# EAGLE board SO16 (EAGLE 6.4)
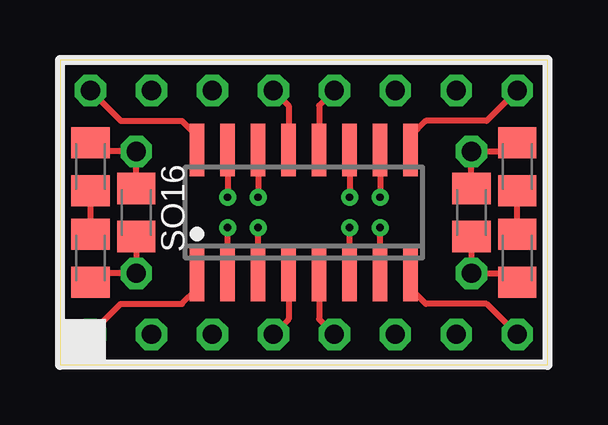
[diagram p0: board, top side]
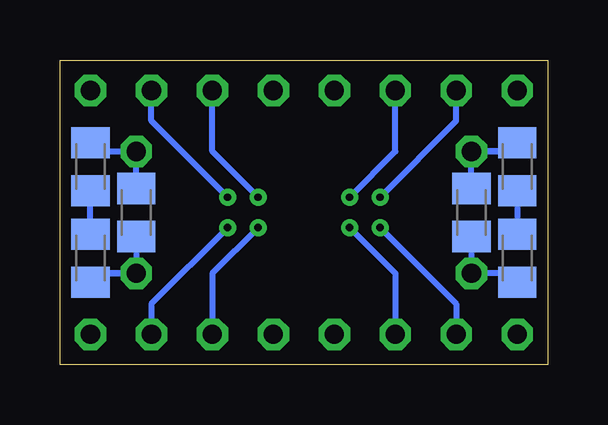
[diagram p1: board, bottom side, seen from below]

Size 20.32 x 12.7 mm. Coordinates in mm from the lower left corner, seen from the top.
Outline: 0,0 20.32,0 20.32,12.7 0,12.7 0,0
Copper layers (1*16): Top 0.035mm / dielectric 1.5mm / Bottom 0.035mm
Design rules "default": minimum track width 10mil, minimum drill 0.6mm, track to track 8mil, track to pad 8mil, pad to pad 8mil, via to via 8mil, smd to smd 8mil, copper to edge 40mil, drill to drill 8mil, minimum pad ring 10mil, minimum via ring 8mil, stop-mask expansion 4mil, vias tented up to drill 0mil, thermal gap 10mil

## Footprints (pad centres in the part's own frame; a part is rotated, then mirrored left to right if it is on the bottom)
SO16 = smd 0.6 x 2.2: 1 -4.445,-2.6; 2 -3.175,-2.6; 3 -1.905,-2.6; 4 -0.635,-2.6; 5 0.635,-2.6; 6 1.905,-2.6; 7 3.175,-2.6; 8 4.445,-2.6; 9 4.445,2.6; 10 3.175,2.6; 11 1.905,2.6; 12 0.635,2.6; 13 -0.635,2.6; 14 -1.905,2.6; 15 -3.175,2.6; 16 -4.445,2.6
1 = drill 0.8 octagon: P$1 0,0
C0805K = smd 1.3 x 1.6: 1 -1,0; 2 1,0

## Placement (x,y rotation side)
E$71  [SO16]  10.16,6.35 0 top
E$280  [1]  1.27,1.27 0 top
E$292  [1]  3.81,1.27 0 top
E$293  [1]  6.35,1.27 0 top
E$294  [1]  8.89,1.27 0 top
E$295  [1]  11.43,1.27 0 top
E$296  [1]  13.97,1.27 0 top
E$297  [1]  16.51,1.27 0 top
E$298  [1]  1.27,11.43 0 top
E$299  [1]  3.81,11.43 0 top
E$300  [1]  6.35,11.43 0 top
E$301  [1]  8.89,11.43 0 top
E$302  [1]  11.43,11.43 0 top
E$303  [1]  13.97,11.43 0 top
E$304  [1]  16.51,11.43 0 top
E$305  [C0805K]  3.17,6.35 270 top
E$306  [1]  3.17,3.81 180 top
E$307  [1]  3.17,8.89 180 top
E$308  [C0805K]  1.27,4.45 270 top
E$309  [C0805K]  1.27,8.26 270 top
E$310  [C0805K]  1.27,4.45 270 bottom
E$311  [C0805K]  1.27,8.26 270 bottom
E$312  [C0805K]  3.17,6.35 270 bottom
E$313  [1]  19.05,11.43 0 top
E$314  [1]  19.05,1.27 0 top
E$649  [C0805K]  17.14,6.35 90 top
E$650  [1]  17.14,8.89 0 top
E$651  [1]  17.14,3.81 0 top
E$652  [C0805K]  19.05,8.26 90 top
E$653  [C0805K]  19.05,4.45 90 top
E$654  [C0805K]  19.05,8.26 90 bottom
E$655  [C0805K]  19.05,4.45 90 bottom
E$656  [C0805K]  17.14,6.35 90 bottom

## Library data of the parts
E$71 E$305 E$308-E$312 E$649 E$652-E$656 = ref-packages
E$280 E$292-E$304 E$306 E$307 E$313 E$314 E$650 E$651 = drill

## Nets
S$126: E$71.1 E$280.P$1
S$129: E$71.2 E$292.P$1
S$130: E$71.3 E$293.P$1
S$131: E$71.4 E$294.P$1
S$132: E$71.5 E$295.P$1
S$133: E$71.6 E$296.P$1
S$134: E$71.7 E$297.P$1
S$135: E$71.16 E$298.P$1
S$136: E$71.15 E$299.P$1
S$137: E$71.14 E$300.P$1
S$138: E$71.13 E$301.P$1
S$139: E$71.12 E$302.P$1
S$140: E$71.11 E$303.P$1
S$141: E$71.10 E$304.P$1
S$142: E$305.1 E$307.P$1 E$309.1 E$311.1 E$312.1
S$143: E$308.1 E$309.2
S$144: E$305.2 E$306.P$1 E$308.2 E$310.2 E$312.2
S$145: E$310.1 E$311.2
S$146: E$71.9 E$313.P$1
S$147: E$71.8 E$314.P$1
S$321: E$649.1 E$651.P$1 E$653.1 E$655.1 E$656.1
S$322: E$652.1 E$653.2
S$323: E$649.2 E$650.P$1 E$652.2 E$654.2 E$656.2
S$324: E$654.1 E$655.2

## Tracks (layer width: path | path; a pad name or v marks a point on that pad's centre or on a via)
S$126
  Top 0.254: E$280.P$1 2.54,2.54 5.08,2.54 5.71,3.17 E$71.1
S$129  (via drill 0.3)
  Top 0.254: E$71.2 v6.99,5.71
  Bottom 0.254: v6.99,5.71 3.81,2.54 E$292.P$1
S$130  (via drill 0.3)
  Top 0.254: E$71.3 v8.26,5.71
  Bottom 0.254: v8.26,5.71 6.35,3.81 E$293.P$1
S$131
  Top 0.254: E$71.4 9.53,1.91 E$294.P$1
S$132
  Top 0.254: E$71.5 10.79,1.91 E$295.P$1
S$133  (via drill 0.3)
  Top 0.254: E$71.6 v12.06,5.71
  Bottom 0.254: v12.06,5.71 13.97,3.81 E$296.P$1
S$134  (via drill 0.3)
  Top 0.254: E$71.7 v13.34,5.71
  Bottom 0.254: v13.34,5.71 16.51,2.54 E$297.P$1
S$135
  Top 0.254: E$298.P$1 2.54,10.16 5.08,10.16 5.71,9.53 E$71.16
S$136  (via drill 0.3)
  Top 0.254: E$71.15 v6.99,6.99
  Bottom 0.254: v6.99,6.99 3.81,10.16 E$299.P$1
S$137  (via drill 0.3)
  Top 0.254: E$71.14 v8.26,6.99
  Bottom 0.254: v8.26,6.99 6.35,8.89 E$300.P$1
S$138
  Top 0.254: E$301.P$1 9.53,10.79 E$71.13
S$139
  Top 0.254: E$302.P$1 10.79,10.79 E$71.12
S$140  (via drill 0.3)
  Top 0.254: E$71.11 v12.06,6.99
  Bottom 0.254: v12.06,6.99 13.97,8.89 E$303.P$1
S$141  (via drill 0.3)
  Top 0.254: E$71.10 v13.34,6.99
  Bottom 0.254: v13.34,6.99 16.51,10.16 E$304.P$1
S$142
  Top 0.254: E$312.1 E$307.P$1 1.64,8.89 E$311.1
  Bottom 0.254: E$312.1 E$307.P$1 | E$307.P$1 1.64,8.89 E$311.1 1,9.26 0.64,8.89 E$307.P$1
S$143
  Top 0.254: E$309.2 E$308.1
S$144
  Top 0.254: E$308.2 1.27,3.81 E$306.P$1 E$305.2
  Bottom 0.254: E$305.2 E$306.P$1 1.64,3.81 E$308.2
S$145
  Bottom 0.254: E$311.2 E$310.1
S$146
  Top 0.254: E$313.P$1 17.78,10.16 15.24,10.16 14.61,9.53 E$71.9
S$147
  Top 0.254: E$314.P$1 17.78,2.54 15.24,2.54 14.61,3.17 E$71.8
S$321
  Top 0.254: E$656.1 E$651.P$1 18.68,3.81 E$655.1
  Bottom 0.254: E$656.1 E$651.P$1 | E$651.P$1 18.68,3.81 E$655.1 19.32,3.44 19.68,3.81 E$651.P$1
S$322
  Top 0.254: E$653.2 E$652.1
S$323
  Top 0.254: E$652.2 19.05,8.89 E$650.P$1 E$649.2
  Bottom 0.254: E$649.2 E$650.P$1 18.68,8.89 E$652.2
S$324
  Bottom 0.254: E$655.2 E$654.1

## Text on the board
tPlace: SO16